# EAGLE board solenoid valve ver2  (EAGLE 9.2.2)
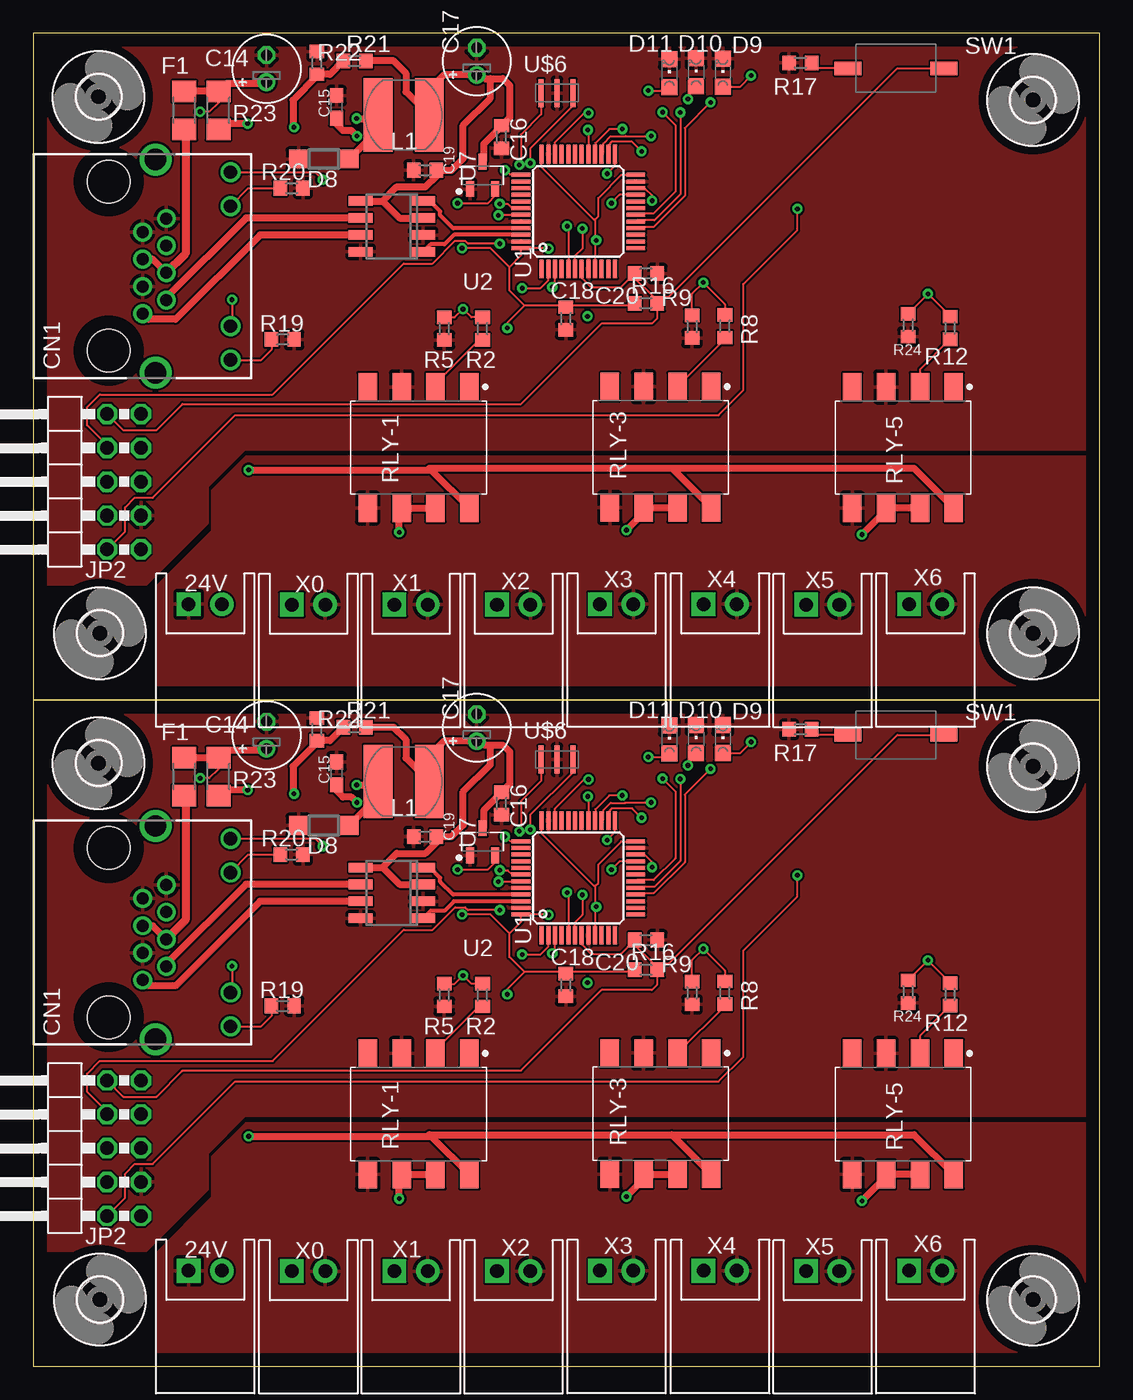
[diagram p0: board, top side]
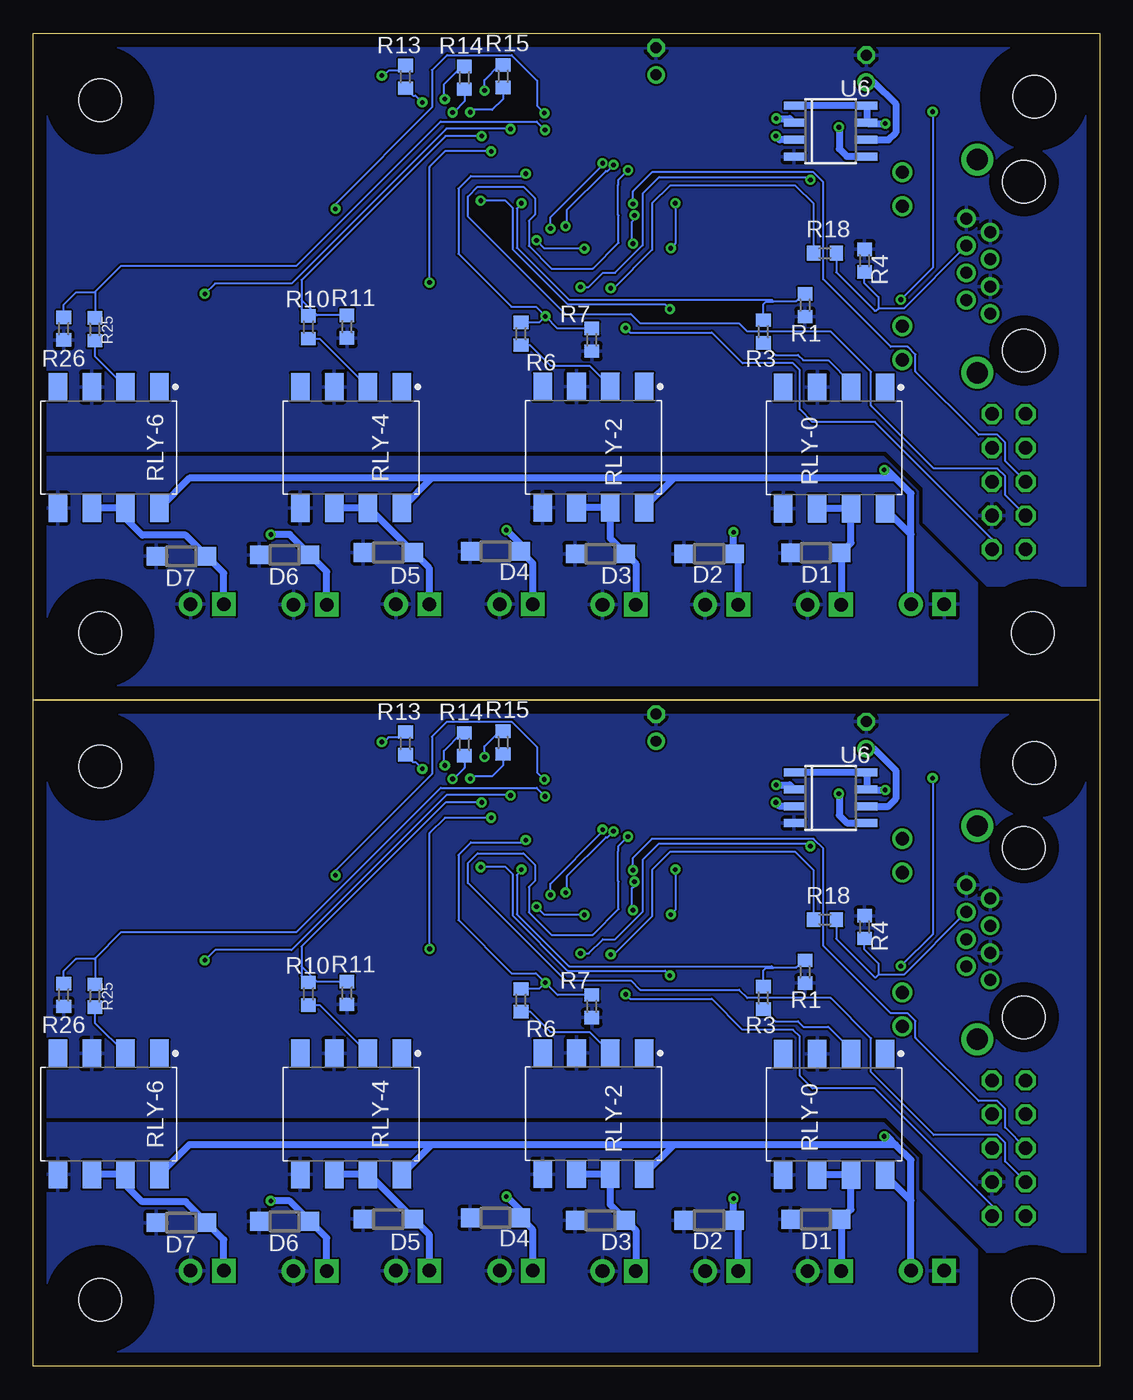
[diagram p1: board, bottom side, seen from below]

Size 80 x 100 mm. Coordinates in mm from the lower left corner, seen from the top.
Outline: 80,50 80,0 0,0 0,50
Outline: 80,50 0,50
Outline: 0,50 80,50
Outline: 80,50 80,100 0,100 0,50
Copper layers (1*16): Top 0.035mm / dielectric 1.5mm / Bottom 0.035mm
Design rules "default": minimum track width 6mil, minimum drill 0.35mm, track to track 6mil, track to pad 6mil, pad to pad 6mil, via to via 6mil, smd to smd 6mil, copper to edge 40mil, drill to drill 6mil, minimum pad ring 10mil, minimum via ring 8mil, stop-mask expansion 4mil, vias tented up to drill 0mil, thermal gap 10mil

## Footprints (pad centres in the part's own frame; a part is rotated, then mirrored left to right if it is on the bottom)
S2B-XH-A = drill 1.016 pad 1.778 square: 1 1.25,0 | drill 1.016 pad 1.778: 2 -1.25,0
E2-5 = drill 0.813 pad 1.27: + -1.016,0 | drill 0.813 pad 1.27 octagon: - 1.016,0
C0603 = smd 1.1 x 1: 1 -0.85,0; 2 0.85,0
C0603' = smd 1 x 1.1: 1 -0.85,0; 2 0.85,0
8P8C-LED = drill 0.9 pad 1.3: 1 3.57,-3.81; 2 2.55,-2.03; 3 1.53,-3.81; 4 0.51,-2.03; 5 -0.51,-3.81; 6 -1.53,-2.03; 7 -2.55,-3.81; 8 -3.57,-2.03 | drill 1 pad 1.422: GA 4.5,2.78; GC 7.04,2.78; YA -7.04,2.78; YC -4.5,2.78 | drill 1.6 pad 2.184: M1 -8,-2.85; M2 8,-2.85 | hole 3.2: 6.35,-6.35; -6.35,-6.35
SOD123 = smd 1.4 x 1.4: A 1.9,0; C -1.9,0
CHIPLED_0805 = smd 1.2 x 1.2: A 0,-1.05; C 0,1.05
R1206 = smd 1.6 x 1.803: 1 -1.422,0; 2 1.422,0
2X05/90 = drill 1.016 octagon: 1 -5.08,-6.35; 2 -5.08,-3.81; 3 -2.54,-6.35; 4 -2.54,-3.81; 5 0,-6.35; 6 0,-3.81; 7 2.54,-6.35; 8 2.54,-3.81; 9 5.08,-6.35; 10 5.08,-3.81
L5852 = smd 2.15 x 5.5: P$1 1.925,0; P$2 -1.925,0
R0603 = smd 1 x 1.1: 1 -0.85,0; 2 0.85,0
SOP254P1016X385-8 = smd 2.09 x 1.389: 1 -4.54,3.81; 2 -4.54,1.27; 3 -4.54,-1.27; 4 -4.54,-3.81; 5 4.54,-3.81; 6 4.54,-1.27; 7 4.54,1.27; 8 4.54,3.81
SWITCH_TACTILE_3X6 = smd 2 x 1: P$1 -3.6,0; P$2 3.6,0
LQFP48 = smd 1.4 x 0.3: 1 -4.3,2.75; 2 -4.3,2.25; 3 -4.3,1.75; 4 -4.3,1.25; 5 -4.3,0.75; 6 -4.3,0.25; 7 -4.3,-0.25; 8 -4.3,-0.75; 9 -4.3,-1.25; 10 -4.3,-1.75; 11 -4.3,-2.25; 12 -4.3,-2.75; 25 4.3,-2.75; 26 4.3,-2.25; 27 4.3,-1.75; 28 4.3,-1.25; 29 4.3,-0.75; 30 4.3,-0.25; 31 4.3,0.25; 32 4.3,0.75; 33 4.3,1.25; 34 4.3,1.75; 35 4.3,2.25; 36 4.3,2.75 | smd 0.3 x 1.4: 13 -2.75,-4.3; 14 -2.25,-4.3; 15 -1.75,-4.3; 16 -1.25,-4.3; 17 -0.75,-4.3; 18 -0.25,-4.3; 19 0.25,-4.3; 20 0.75,-4.3; 21 1.25,-4.3; 22 1.75,-4.3; 23 2.25,-4.3; 24 2.75,-4.3; 37 2.75,4.3; 38 2.25,4.3; 39 1.75,4.3; 40 1.25,4.3; 41 0.75,4.3; 42 0.25,4.3; 43 -0.25,4.3; 44 -0.75,4.3; 45 -1.25,4.3; 46 -1.75,4.3; 47 -2.25,4.3; 48 -2.75,4.3
SO08 = smd 0.72 x 1.78: 1 -1.905,-2.35; 2 -0.635,-2.35; 3 0.635,-2.35; 4 1.905,-2.35; 5 1.905,2.35; 6 0.635,2.35; 7 -0.635,2.35; 8 -1.905,2.35
SOIC8 = smd 0.6 x 1.5: 1 -1.905,-2.75; 2 -0.635,-2.75; 3 0.635,-2.75; 4 1.905,-2.75; 5 1.905,2.75; 6 0.635,2.75; 7 -0.635,2.75; 8 -1.905,2.75
SOT95P240X110-3 = smd 1.18 x 0.609: 1 -1.024,0.95; 2 -1.024,-0.95; 3 1.024,0
3,2 = hole 3.2: 0,0
CSTCE8M00G55 = smd 0.4 x 2.1: 1 -1.2,0; 2 0,0; 3 1.2,0

## Placement (x,y rotation side)
24V  [S2B-XH-A]  12.9,7.16 180 top
24V1  [S2B-XH-A]  12.9,57.16 180 top
C1  22u  [E2-5]  17.5,97.35 90 top
C2  [C0603]  22.76,94.48 90 top
C3  100n  [C0603']  35.13,92.21 270 top
C4  22u  [E2-5]  33.27,97.9 90 top
C5  100n  [C0603']  39.95,78.6 270 top
C6  100n  [C0603']  29.39,89.73 0 top
C7  100n  [C0603']  45.97,81.98 180 top
C14  22u  [E2-5]  17.5,47.35 90 top
C15  [C0603]  22.76,44.48 90 top
C16  100n  [C0603']  35.13,42.21 270 top
C17  22u  [E2-5]  33.27,47.9 90 top
C18  100n  [C0603']  39.95,28.6 270 top
C19  100n  [C0603']  29.39,39.73 0 top
C20  100n  [C0603']  45.97,31.98 180 top
CN1  8P8C-LED  [8P8C-LED]  12.01,32.54 270 top
CN2  8P8C-LED  [8P8C-LED]  12.01,82.54 270 top
D1  [SOD123]  21.29,11.02 180 bottom
D2  [SOD123]  29.29,10.95 180 bottom
D3  [SOD123]  37.44,10.95 180 bottom
D4  [SOD123]  45.31,11.13 180 bottom
D5  [SOD123]  53.37,11.05 180 bottom
D6  [SOD123]  61.14,10.87 180 bottom
D7  [SOD123]  68.88,10.77 180 bottom
D8  [SOD123]  21.79,40.56 180 top
D9  [CHIPLED_0805]  51.74,47.04 0 top
D10  [CHIPLED_0805]  49.73,47.07 0 top
D11  [CHIPLED_0805]  47.73,47.02 0 top
D12  [SOD123]  21.29,61.02 180 bottom
D13  [CHIPLED_0805]  49.73,97.07 0 top
D14  [CHIPLED_0805]  47.73,97.02 0 top
D15  [SOD123]  29.29,60.95 180 bottom
D16  [SOD123]  37.44,60.95 180 bottom
D17  [SOD123]  45.31,61.13 180 bottom
D18  [SOD123]  53.37,61.05 180 bottom
D19  [SOD123]  61.14,60.87 180 bottom
D20  [SOD123]  68.88,60.77 180 bottom
D21  [SOD123]  21.79,90.56 180 top
D22  [CHIPLED_0805]  51.74,97.04 0 top
F1  [R1206]  11.33,44.22 270 top
F2  [R1206]  11.33,94.22 270 top
JP1  [2X05/90]  1.73,66.36 90 top
JP2  [2X05/90]  1.73,16.36 90 top
L1  L5852  [L5852]  27.79,43.87 180 top
L2  L5852  [L5852]  27.79,93.87 180 top
R1  10k  [R0603]  22.1,29.59 270 bottom
R2  100R  [R0603]  33.71,27.84 270 top
R3  100R  [R0603]  25.22,27.64 270 bottom
R4  100k  [R0603]  17.63,32.94 90 bottom
R5  10k  [R0603]  30.84,27.84 270 top
R6  100R  [R0603]  43.41,27.46 270 bottom
R7  10k  [R0603]  38.1,27 270 bottom
R8  100R  [R0603]  51.89,28.02 270 top
R9  10k  [R0603]  49.43,27.99 270 top
R10  100R  [R0603]  59.36,27.94 270 bottom
R11  10k  [R0603]  56.46,27.99 270 bottom
R12  100R  [R0603]  68.78,27.89 270 top
R13  1k  [R0603]  52.07,46.74 90 bottom
R14  1k  [R0603]  47.65,46.66 90 bottom
R15  1k  [R0603]  44.75,46.79 90 bottom
R16  10k  [R0603]  45.97,29.74 0 top
R17  100  [R0603]  57.56,47.78 180 top
R18  1k  [R0603]  20.6,33.5 0 bottom
R19  4k7  [R0603]  18.72,27.03 180 top
R20  1k  [R0603]  19.38,38.38 180 top
R21  [R0603]  24.1,47.93 0 top
R22  [R0603]  21.29,47.78 270 top
R23  [R1206]  13.89,44.22 270 top
R24  10k  [R0603]  65.63,28.09 270 top
R25  100R  [R0603]  75.39,27.79 270 bottom
R26  10k  [R0603]  77.72,27.84 270 bottom
R27  10k  [R0603]  22.1,79.59 270 bottom
R28  100R  [R0603]  59.36,77.94 270 bottom
R29  10k  [R0603]  56.46,77.99 270 bottom
R30  100R  [R0603]  68.78,77.89 270 top
R31  1k  [R0603]  52.07,96.74 90 bottom
R32  1k  [R0603]  47.65,96.66 90 bottom
R33  1k  [R0603]  44.75,96.79 90 bottom
R34  10k  [R0603]  45.97,79.74 0 top
R35  100  [R0603]  57.56,97.78 180 top
R36  1k  [R0603]  20.6,83.5 0 bottom
R37  4k7  [R0603]  18.72,77.03 180 top
R38  100R  [R0603]  33.71,77.84 270 top
R39  1k  [R0603]  19.38,88.38 180 top
R40  [R0603]  24.1,97.93 0 top
R41  [R0603]  21.29,97.78 270 top
R42  [R1206]  13.89,94.22 270 top
R43  10k  [R0603]  65.63,78.09 270 top
R44  100R  [R0603]  75.39,77.79 270 bottom
R45  10k  [R0603]  77.72,77.84 270 bottom
R46  100R  [R0603]  25.22,77.64 270 bottom
R47  100k  [R0603]  17.63,82.94 90 bottom
R48  10k  [R0603]  30.84,77.84 270 top
R49  100R  [R0603]  43.41,77.46 270 bottom
R50  10k  [R0603]  38.1,77 270 bottom
R51  100R  [R0603]  51.89,78.02 270 top
R52  10k  [R0603]  49.43,77.99 270 top
RLY-0  PHOTORELAY  [SOP254P1016X385-8]  19.91,18.9 270 bottom
RLY-1  PHOTORELAY  [SOP254P1016X385-8]  28.91,18.92 270 top
RLY-2  PHOTORELAY  [SOP254P1016X385-8]  37.97,18.95 270 bottom
RLY-3  PHOTORELAY  [SOP254P1016X385-8]  47.07,18.95 270 top
RLY-4  PHOTORELAY  [SOP254P1016X385-8]  56.16,18.92 270 bottom
RLY-5  PHOTORELAY  [SOP254P1016X385-8]  65.25,18.92 270 top
RLY-6  PHOTORELAY  [SOP254P1016X385-8]  74.35,18.92 270 bottom
RLY-7  PHOTORELAY  [SOP254P1016X385-8]  19.91,68.9 270 bottom
RLY-8  PHOTORELAY  [SOP254P1016X385-8]  28.91,68.92 270 top
RLY-9  PHOTORELAY  [SOP254P1016X385-8]  37.97,68.95 270 bottom
RLY-10  PHOTORELAY  [SOP254P1016X385-8]  47.07,68.95 270 top
RLY-11  PHOTORELAY  [SOP254P1016X385-8]  56.16,68.92 270 bottom
RLY-12  PHOTORELAY  [SOP254P1016X385-8]  65.25,68.92 270 top
RLY-13  PHOTORELAY  [SOP254P1016X385-8]  74.35,68.92 270 bottom
SW1  SWITCH_TACTILETOP  [SWITCH_TACTILE_3X6]  64.72,47.37 0 top
SW2  SWITCH_TACTILETOP  [SWITCH_TACTILE_3X6]  64.72,97.37 0 top
U1  STM32F103C8  [LQFP48]  40.89,36.63 90 top
U2  NCV7351D1E  [SO08]  26.9,35.51 90 top
U3  STM32F103C8  [LQFP48]  40.89,86.63 90 top
U4  NCV7351D1E  [SO08]  26.9,85.51 90 top
U5  MC34063AD  [SOIC8]  20.17,92.65 270 bottom
U6  MC34063AD  [SOIC8]  20.17,42.65 270 bottom
U7  XC6206  [SOT95P240X110-3]  33.71,39.34 90 top
U8  XC6206  [SOT95P240X110-3]  33.71,89.34 90 top
U$1  [3,2]  5,5 0 top
U$2  [3,2]  4.9,45.24 0 top
U$3  [3,2]  75,45 0 top
U$4  [3,2]  75,5 0 top
U$5  [3,2]  5,55 0 top
U$6  CSTCE8M00G55  [CSTCE8M00G55]  39.29,45.52 0 top
U$7  [3,2]  4.9,95.24 0 top
U$8  [3,2]  75,95 0 top
U$9  [3,2]  75,55 0 top
U$10  CSTCE8M00G55  [CSTCE8M00G55]  39.29,95.52 0 top
X0  [S2B-XH-A]  20.65,7.14 180 top
X1  [S2B-XH-A]  28.35,7.14 180 top
X2  [S2B-XH-A]  36.04,7.14 180 top
X3  [S2B-XH-A]  43.76,7.16 180 top
X4  [S2B-XH-A]  51.54,7.16 180 top
X5  [S2B-XH-A]  59.23,7.14 180 top
X6  [S2B-XH-A]  66.95,7.16 180 top
X7  [S2B-XH-A]  20.65,57.14 180 top
X8  [S2B-XH-A]  28.35,57.14 180 top
X9  [S2B-XH-A]  43.76,57.16 180 top
X10  [S2B-XH-A]  36.04,57.14 180 top
X11  [S2B-XH-A]  51.54,57.16 180 top
X12  [S2B-XH-A]  59.23,57.14 180 top
X13  [S2B-XH-A]  66.95,57.16 180 top

## Library data of the parts
24V 24V1 X0 X1-X13 = jst-xh
C1 C3-C7 C14 C16-C20 R13-R17 R31-R35 = rcl
C2 C15 = rcl; SPICEPREFIX: C
CN1 CN2 = con-rj45; OC_FARNELL: unknown; OC_NEWARK: unknown
D1-D8 D12 D15-D21 = diode
D9-D11 D13 D14 D22 = led
F1 F2 R1-R12 R18-R30 R36-R52 = rcl; SPICEPREFIX: R
JP1 JP2 = pinhead
L1 L2 = l_ysk
RLY-0 RLY-1-RLY-13 = opto-coupler
SW1 SW2 = switch-tactile
U1 U3 = stm32_mcu
U2 U4 = on-semi
U5 U6 = mc34063
U7 U8 = torex
U$1-U$5 U$7-U$9 = holes
U$6 U$10 = resonator

## Nets
!EMS: R18.1 U1.2
!EMS1: R36.1 U3.2
!RESET: C20.2 JP2.10 R16.2 SW1.P$2 U1.7
!RESET1: C7.2 JP1.10 R34.2 SW2.P$2 U3.7
+3V1: C5.1 JP1.1 R34.1 U3.9 U3.24 U3.36 U3.48 U8.2
+3V3: C18.1 JP2.1 R16.1 U1.9 U1.24 U1.36 U1.48 U7.2
+5V: C16.1 C17.+ C19.2 L1.P$2 R21.2 U2.3 U2.5 U7.3
+5V1: C3.1 C4.+ C6.2 L2.P$2 R40.2 U4.3 U4.5 U8.3
+24V: C14.+ CN1.GA F1.1 R23.1 U6.6
+24V1: C1.+ CN2.GA F2.1 R42.1 U5.6
CANH: CN1.1 U2.7
CANH1: CN2.1 U4.7
CANL: CN1.2 U2.6
CANL1: CN2.2 U4.6
CANRX: U1.45 U2.4
CANRX1: U3.45 U4.4
CANTX: U1.46 U2.1
CANTX1: U3.46 U4.1
GND: 24V.1 D1.A D2.A D3.A D4.A D5.A D6.A D7.A RLY-0.5 RLY-1.5 RLY-2.5 RLY-3.5 RLY-4.5 RLY-5.5 RLY-6.5 X0.2 X1.2 X2.2 X3.2 X4.2 X5.2 X6.2
GND1: 24V1.1 D12.A D15.A D16.A D17.A D18.A D19.A D20.A RLY-7.5 RLY-8.5 RLY-9.5 RLY-10.5 RLY-11.5 RLY-12.5 RLY-13.5 X7.2 X8.2 X9.2 X10.2 X11.2 X12.2 X13.2
GNDIO: C14.- C15.2 C16.2 C17.- C18.2 C19.1 C20.1 CN1.3 CN1.7 CN1.8 D8.A D9.C D10.C D11.C JP2.3 R1.2 R4.2 R5.2 R7.2 R9.2 R11.2 R17.2 R19.1 R20.1 R22.1 R24.2 R26.2 RLY-0.3 RLY-1.3 RLY-2.3 RLY-3.3 RLY-4.3 RLY-5.3 RLY-6.3 U1.8 U1.23 U1.35 U1.44 U1.47 U2.2 U2.8 U6.4 U7.1 U$6.2
GNDIO1: C1.- C2.2 C3.2 C4.- C5.2 C6.1 C7.1 CN2.3 CN2.7 CN2.8 D13.C D14.C D21.A D22.C JP1.3 R27.2 R29.2 R35.2 R37.1 R39.1 R41.1 R43.2 R45.2 R47.2 R48.2 R50.2 R52.2 RLY-7.3 RLY-8.3 RLY-9.3 RLY-10.3 RLY-11.3 RLY-12.3 RLY-13.3 U3.8 U3.23 U3.35 U3.44 U3.47 U4.2 U4.8 U5.4 U8.1 U$10.2
LED0: R13.1 U1.16
LED1: R14.1 U1.17
LED2: R15.1 U1.18
LED3: R33.1 U3.18
LED4: R31.1 U3.16
LED5: R32.1 U3.17
LED_CAN: CN1.YA U1.3
LED_CAN1: CN2.YA U3.3
N$1: D2.C RLY-1.6 RLY-1.7 X1.1
N$2: R2.2 RLY-1.2
N$3: D1.C RLY-0.6 RLY-0.7 X0.1
N$4: D12.C RLY-7.6 RLY-7.7 X7.1
N$5: D3.C RLY-2.6 RLY-2.7 X2.1
N$6: R3.2 RLY-0.2
N$7: R46.2 RLY-7.2
N$8: R6.2 RLY-2.2
N$9: D10.A R14.2
N$10: D9.A R13.2
N$11: U1.6 U$6.3
N$12: CN1.4 CN1.5 F1.2
N$13: R23.2 U6.1 U6.7 U6.8
N$14: D8.C L1.P$1 U6.2
N$15: C15.1 U6.3
N$16: R17.1 SW1.P$1
N$17: R21.1 R22.2 U6.5
N$18: CN1.YC R20.2
N$19: U1.5 U$6.1
N$20: D15.C RLY-8.6 RLY-8.7 X8.1
N$21: D11.A R15.2
N$22: CN1.GC R19.2
N$23: D4.C RLY-3.6 RLY-3.7 X3.1
N$24: R8.2 RLY-3.2
N$25: R38.2 RLY-8.2
N$26: D5.C RLY-4.6 RLY-4.7 X4.1
N$27: R10.2 RLY-4.2
N$28: D16.C RLY-9.6 RLY-9.7 X10.1
N$29: D6.C RLY-5.6 RLY-5.7 X5.1
N$30: R12.2 RLY-5.2
N$31: R49.2 RLY-9.2
N$32: D7.C RLY-6.6 RLY-6.7 X6.1
N$33: R25.2 RLY-6.2
N$34: D17.C RLY-10.6 RLY-10.7 X9.1
N$35: R51.2 RLY-10.2
N$36: D18.C RLY-11.6 RLY-11.7 X11.1
N$37: R28.2 RLY-11.2
N$38: CN1.6 R4.1 R18.2
N$39: D19.C RLY-12.6 RLY-12.7 X12.1
N$40: R30.2 RLY-12.2
N$41: D20.C RLY-13.6 RLY-13.7 X13.1
N$42: R44.2 RLY-13.2
N$43: D13.A R32.2
N$44: D22.A R31.2
N$45: U3.5 U$10.1
N$46: R35.1 SW2.P$1
N$47: D14.A R33.2
N$48: CN2.4 CN2.5 F2.2
N$49: R42.2 U5.1 U5.7 U5.8
N$50: D21.C L2.P$1 U5.2
N$51: C2.1 U5.3
N$52: R40.1 R41.2 U5.5
N$53: CN2.6 R36.2 R47.1
N$54: U3.6 U$10.3
N$55: CN2.GC R37.2
N$56: CN2.YC R39.2
SOLV0: R1.1 R3.1 U1.21
SOLV1: R2.1 R5.1 U1.22
SOLV2: R6.1 R7.1 U1.25
SOLV3: R8.1 R9.1 U1.26
SOLV4: R10.1 R11.1 U1.27
SOLV5: R12.1 R24.1 U1.28
SOLV6: R25.1 R26.1 U1.29
SOLV7: U1.30
SOLV8: U1.41
SOLV9: R49.1 R50.1 U3.25
SOLV10: R38.1 R48.1 U3.22
SOLV11: R51.1 R52.1 U3.26
SOLV12: R30.1 R43.1 U3.28
SOLV13: R44.1 R45.1 U3.29
SOLV14: U3.30
SOLV15: U3.41
SOLV16: R27.1 R46.1 U3.21
SOLV17: R28.1 R29.1 U3.27
SWCLK: JP2.4 U1.37
SWCLK1: JP1.4 U3.37
SWDIO: JP2.2 U1.34
SWDIO1: JP1.2 U3.34
UART_RX: JP2.8 U1.43
UART_RX1: JP1.8 U3.43
UART_TX: JP2.6 U1.42
UART_TX1: JP1.6 U3.42
VCC: 24V.2 RLY-0.8 RLY-1.8 RLY-2.8 RLY-3.8 RLY-4.8 RLY-5.8 RLY-6.8
VCC1: 24V1.2 RLY-7.8 RLY-8.8 RLY-9.8 RLY-10.8 RLY-11.8 RLY-12.8 RLY-13.8

## Tracks (layer width: path | path; a pad name or v marks a point on that pad's centre or on a via)
!EMS  (via drill 0.35)
  Top 0.152: v36.68,30.89 38.05,30.89 38.64,31.48 U1.2
  Bottom 0.152: v36.68,30.89 36.45,30.89 33.58,33.76 33.58,37.24 32.25,38.57 22.81,38.57 21.45,37.21 R18.1
!EMS1  (via drill 0.35)
  Top 0.152: v36.68,80.89 38.05,80.89 38.64,81.48 U3.2
  Bottom 0.152: v36.68,80.89 36.45,80.89 33.58,83.76 33.58,87.24 32.25,88.57 22.81,88.57 21.45,87.21 R36.1
!RESET
  Top 0.152: U1.7 41.14,31.64 41.16,31.64 41.86,30.94 44.08,30.94 C20.2 45.12,31.62 46.52,30.23 | 46.52,30.23 46.82,29.92 R16.2 46.82,28.63 46.42,28.22 42.63,28.22 36.6,22.19 11.18,22.19 11.18,22.15 9.25,20.22 6.76,20.22 JP2.10 | 46.52,30.23 47.69,30.23 64.83,47.37 SW1.P$2
!RESET1
  Top 0.152: U3.7 41.14,81.64 41.16,81.64 41.86,80.94 44.08,80.94 C7.2 45.12,81.62 46.52,80.23 | 46.52,80.23 46.82,79.92 R34.2 46.82,78.63 46.42,78.22 42.63,78.22 36.6,72.19 11.18,72.19 11.18,72.15 9.25,70.22 6.76,70.22 JP1.10 | 46.52,80.23 47.69,80.23 64.83,97.37 SW2.P$2
+3V1  (via drill 0.35)
  Top 0.152: U3.36 38.14,89.95 42.08,86.02 42.14,86.02 | v38.66,83.86 38.64,83.88 U3.48 36.59,83.34 35.73,82.47 | v31.83,87.26 34.11,87.26 34.66,87.81 U8.2 | R34.1 44.97,79.59 40.09,79.59 C5.1 39.84,79.57 36.85,79.57 | v32.17,83.88 34.32,83.88 35.73,82.47 | 42.14,86.02 42.14,84.57 v42.24,84.47 42.14,84.37 U3.9 | 42.14,86.02 42.39,86.27 42.39,87.64 44.13,89.38 U3.24 | 36.85,79.57 35.73,80.7 35.73,82.47 | v35.56,77.89 35.56,78.27 36.85,79.57
  Bottom 0.152: v38.66,83.86 41.63,83.86 v42.24,84.47 | v31.83,87.26 31.83,84.22 v32.17,83.88 | JP1.1 8.08,62.06 16.86,70.84 21.54,70.84 22.49,71.79 22.49,74.74 22.99,75.24 26.78,75.24 29.1,77.56 35.23,77.56 v35.56,77.89
+3V3  (via drill 0.35)
  Top 0.152: U1.36 38.14,39.95 42.08,36.02 42.14,36.02 | v38.66,33.86 38.64,33.88 U1.48 36.59,33.34 35.73,32.47 | v31.83,37.26 34.11,37.26 34.66,37.8 U7.2 | R16.1 44.97,29.59 40.09,29.59 C18.1 39.84,29.57 36.85,29.57 | v32.17,33.88 34.32,33.88 35.73,32.47 | 42.14,36.02 42.14,34.57 v42.24,34.47 42.14,34.37 U1.9 | 42.14,36.02 42.39,36.27 42.39,37.64 44.13,39.38 U1.24 | 36.85,29.57 35.73,30.7 35.73,32.47 | v35.56,27.89 35.56,28.27 36.85,29.57
  Bottom 0.152: v38.66,33.86 41.63,33.86 v42.24,34.47 | v31.83,37.26 31.83,34.22 v32.17,33.88 | JP2.1 8.08,12.06 16.86,20.84 21.54,20.84 22.49,21.79 22.49,24.74 22.99,25.24 26.78,25.24 29.1,27.56 35.23,27.56 v35.56,27.89
+5V
  Top 0.508: R21.2 27.04,47.93 27.96,47 27.96,45.61 L1.P$2 29.71,45.79 30.81,46.89 C17.+ 33.58,46.89 33.87,46.6 34.29,46.6 | U7.3 33.78,40.45 33.78,41.69 35.13,43.04 C16.1 35.74,43.67 35.74,46.1 35.24,46.6 34.29,46.6 | 26.2,37.41 27.47,36.14 U2.3 | 34.29,46.6 34.29,45.14 32.26,43.1 32.26,40.6 31.38,39.73 C19.2 30.24,39.29 29.43,38.48 27.27,38.48 26.2,37.41 | U2.5 26.2,37.41
+5V1
  Top 0.508: R40.2 27.04,97.93 27.96,97 27.96,95.61 L2.P$2 29.71,95.79 30.81,96.89 C4.+ 33.58,96.89 33.87,96.6 34.29,96.6 | U8.3 33.78,90.44 33.78,91.69 35.13,93.04 C3.1 35.74,93.67 35.74,96.1 35.24,96.6 34.29,96.6 | 26.2,87.41 27.47,86.14 U4.3 | 34.29,96.6 34.29,95.14 32.26,93.1 32.26,90.6 31.38,89.73 C6.2 30.24,89.29 29.43,88.48 27.27,88.48 26.2,87.41 | U4.5 26.2,87.41
+24V  (via drill 0.35)
  Top 0.152: R23.1 13.89,44.81 13.21,44.12 v12.52,44.12 | v14.91,30.02 14.91,28.15 CN1.GA
  Top 0.508: F1.1 R23.1 14.45,46.2 17.37,46.2 C14.+
  Bottom 0.152: v12.52,44.12 12.52,32.41 v14.91,30.02
  Bottom 0.508: U6.6 15.84,42.01 15.3,42.56 15.3,44.71 16.92,46.33 C14.+
+24V1  (via drill 0.35)
  Top 0.152: R42.1 13.89,94.81 13.21,94.12 v12.52,94.12 | v14.91,80.02 14.91,78.15 CN2.GA
  Top 0.508: F2.1 R42.1 14.45,96.2 17.37,96.2 C1.+
  Bottom 0.152: v12.52,94.12 12.52,82.41 v14.91,80.02
  Bottom 0.508: U5.6 15.84,92.01 15.3,92.56 15.3,94.71 16.92,96.33 C1.+
CANH
  Top 0.508: U2.7 17,34.87 10.67,28.55 8.62,28.55 CN1.1
CANH1
  Top 0.508: U4.7 17,84.87 10.67,78.55 8.62,78.55 CN2.1
CANL
  Top 0.508: CN1.2 9.98,30.17 15.96,36.14 U2.6
CANL1
  Top 0.508: CN2.2 9.98,80.17 15.96,86.14 U4.6
CANRX
  Top 0.305: U1.45 31.5,35.38 30.53,36.35 30.53,36.65 29.76,37.41 U2.4
CANRX1
  Top 0.305: U3.45 31.5,85.38 30.53,86.35 30.53,86.64 29.76,87.41 U4.4
CANTX
  Top 0.305: U1.46 31.56,34.88 30.85,34.16 29.81,34.16 U2.1
CANTX1
  Top 0.305: U3.46 31.56,84.88 30.85,84.16 29.81,84.16 U4.1
GND
  pour Top: 9.22,-1.47 9.22,8.48 13.44,12.7 13.44,15.75 15.95,18.26 80.16,18.26 80.16,-0.1 10.59,-0.1
  pour Bottom: 9.17,-0.2 9.17,8.74 13.59,13.16 13.59,15.61 16.2,18.21 80.06,18.21 80.06,-0.33 79.91,-0.48 9.45,-0.48
GND1
  pour Top: 9.22,48.53 9.22,58.48 13.44,62.7 13.44,65.75 15.95,68.26 80.16,68.26 80.16,49.9 10.59,49.9
  pour Bottom: 9.17,49.8 9.17,58.74 13.59,63.16 13.59,65.61 16.2,68.21 80.06,68.21 80.06,49.67 79.91,49.52 9.45,49.52
GNDIO
  pour Top: 0,50.04 0,8.71 0.05,8.66 8.51,8.66 10.26,10.41 13.11,13.26 13.11,15.98 15.9,18.77 80.06,18.77 80.06,49.91 79.88,50.09 0.05,50.09
  pour Bottom: 0,49.89 0,8.61 0.03,8.59 0.08,8.53 8.43,8.53 13.18,13.28 13.18,15.88 15.98,18.67 79.81,18.67 80.01,18.87 80.01,50.04 0.15,50.04
GNDIO1
  pour Top: 0,100.04 0,58.71 0.05,58.66 8.51,58.66 10.26,60.41 13.11,63.26 13.11,65.98 15.9,68.77 80.06,68.77 80.06,99.91 79.88,100.09 0.05,100.09
  pour Bottom: 0,99.89 0,58.61 0.03,58.59 0.08,58.53 8.43,58.53 13.18,63.28 13.18,65.88 15.98,68.67 79.81,68.67 80.01,68.87 80.01,100.04 0.15,100.04
LED0  (via drill 0.35)
  Top 0.152: v50.81,44.82 48.88,42.89 48.88,37.81 46.55,35.47 45.29,35.47 U1.16
  Bottom 0.152: R13.1 51.51,45.33 51.32,45.33 v50.81,44.82
LED1  (via drill 0.35)
  Top 0.152: U1.17 45.29,35.97 46.6,35.97 48.54,37.92 v48.54,44.06
  Bottom 0.152: R14.1 47.65,44.9 48.41,44.14 48.47,44.14 v48.54,44.06
LED2  (via drill 0.35)
  Top 0.152: U1.18 45.29,36.47 46.55,36.47 48.18,38.1 48.18,43.12 v47.22,44.08
  Bottom 0.152: R15.1 44.76,45.07 45.57,44.26 47.04,44.26 v47.22,44.08
LED3  (via drill 0.35)
  Top 0.152: U3.18 45.29,86.47 46.55,86.47 48.18,88.11 48.18,93.12 v47.22,94.08
  Bottom 0.152: R33.1 44.76,95.07 45.57,94.26 47.04,94.26 v47.22,94.08
LED4  (via drill 0.35)
  Top 0.152: v50.81,94.82 48.88,92.89 48.88,87.81 46.55,85.47 45.29,85.47 U3.16
  Bottom 0.152: R31.1 51.51,95.33 51.32,95.33 v50.81,94.82
LED5  (via drill 0.35)
  Top 0.152: U3.17 45.29,85.97 46.6,85.97 48.54,87.92 v48.54,94.06
  Bottom 0.152: R32.1 47.65,94.89 48.41,94.14 48.47,94.14 v48.54,94.06
LED_CAN  (via drill 0.35)
  Top 0.152: CN1.YA 21.13,39.58 v21.69,39.01 | v38.94,30.96 39.12,31.14 39.12,32.3 U1.3
  Bottom 0.152: v38.94,30.96 38.33,30.96 37.26,32.03 36.35,32.03 34.29,34.09 34.29,37.98 33.05,39.22 21.89,39.22 v21.69,39.01
LED_CAN1  (via drill 0.35)
  Top 0.152: CN2.YA 21.13,89.58 v21.69,89.01 | v38.94,80.96 39.12,81.14 39.12,82.3 U3.3
  Bottom 0.152: v38.94,80.96 38.33,80.96 37.26,82.03 36.35,82.03 34.29,84.09 34.29,87.97 33.05,89.22 21.89,89.22 v21.69,89.01
N$1  (via drill 0.35)
  Top 0.508: v27.46,12.57 27.46,14.21 RLY-1.6 RLY-1.7
  Bottom 0.508: X1.1 27.1,10.66 D2.C 27.46,11.02 v27.46,12.57
N$2
  Top 0.152: R2.2 33.43,26.99 30.18,23.74 RLY-1.2
N$3
  Bottom 0.508: X0.1 19.39,7.15 D1.C 18.64,11.77 RLY-0.7 RLY-0.6
N$4
  Bottom 0.508: X7.1 19.39,57.15 D12.C 18.64,61.77 RLY-7.7 RLY-7.6
N$5
  Bottom 0.508: X2.1 34.79,10.2 D3.C 36.7,12.11 RLY-2.7 RLY-2.6
N$6
  Bottom 0.152: R3.2 24.31,25.87 22.63,25.87 22.23,25.47 20.34,25.47 18.64,23.77 RLY-0.2
N$7
  Bottom 0.152: R46.2 24.31,75.87 22.63,75.87 22.23,75.47 20.34,75.47 18.64,73.77 RLY-7.2
N$8
  Bottom 0.152: R6.2 42.75,26.61 41.2,25.06 38.28,25.06 RLY-2.2
N$9  (via drill 0.35)
  Top 0.152: D10.A 49.12,45.41 v49.12,45.07
  Bottom 0.152: R14.2 47.85,47.51 49.2,46.16 49.2,45.15 v49.12,45.07
N$10  (via drill 0.35)
  Top 0.152: D9.A 53.04,45.99 53.85,46.8 v53.85,46.83
  Bottom 0.152: R13.2 52.07,47.19 53.34,47.19 53.7,46.83 v53.85,46.83
N$11  (via drill 0.35)
  Top 0.152: U$6.3 40.49,44.56 37.29,41.35 v37.29,40.26 | v41.2,35.36 41.2,33.86 40.64,33.3 U1.6
  Bottom 0.152: v41.2,35.36 41.2,36.2 37.39,40.01 37.39,40.16 v37.29,40.26
N$12
  Top 0.508: CN1.4 8.96,33.05 CN1.5
  Top 0.61: F1.2 11.43,42.7 11.43,33.47 CN1.4
N$13  (via drill 0.35)
  Top 0.508: R23.2 14.32,43.23 v16.08,43.23
  Bottom 0.508: v16.08,43.23 17.37,43.23 U6.7 U6.8 U6.1
N$14  (via drill 0.35)
  Top 0.508: v24.26,43.61 25.61,43.61 L1.P$1 25.86,42.73 D8.C
  Bottom 0.508: v24.26,43.61 23.25,43.61 U6.2
N$15  (via drill 0.35)
  Top 0.508: v24.28,42.29 23.88,42.7 23.24,42.7 22.76,43.18 C15.1
  Bottom 0.508: U6.3 24,42.01 v24.28,42.29
N$16
  Top 0.152: SW1.P$1 58.81,47.37 R17.1
N$17  (via drill 0.35)
  Top 0.508: R21.1 22.25,46.93 R22.2 21.29,46.8 19.48,45 19.48,43.03 v19.56,42.95
  Bottom 0.508: U6.5 17.44,40.77 18.97,40.77 19.53,41.33 19.53,42.93 v19.56,42.95
N$18
  Top 0.152: CN1.YC 16.14,38.38 R20.2
N$19  (via drill 0.35)
  Top 0.152: U$6.1 38.09,43.92 36.58,42.4 36.58,40.23 v36.47,40.13 | v40.06,35.53 40.15,35.45 U1.5
  Bottom 0.152: v36.47,40.13 36.93,39.67 37.03,39.67 39.98,36.73 39.98,35.61 v40.06,35.53
N$20  (via drill 0.35)
  Top 0.508: v27.46,62.57 27.46,64.2 RLY-8.6 RLY-8.7
  Bottom 0.508: X8.1 27.1,60.66 D15.C 27.46,61.02 v27.46,62.57
N$21  (via drill 0.35)
  Top 0.152: v46.15,45.71 47.47,45.71 D11.A
  Bottom 0.152: R15.2 45.01,47.64 46.15,46.5 v46.15,45.71
N$22
  Top 0.152: R19.2 17.87,26.26 17.1,25.5 CN1.GC
N$23  (via drill 0.35)
  Top 0.152: 45.95,14.41 RLY-3.6
  Top 0.508: v44.5,12.72 45.95,14.17 45.95,14.41 | RLY-3.6 RLY-3.7
  Bottom 0.508: X3.1 42.51,10.23 D4.C 43.41,11.64 v44.5,12.72
N$24
  Top 0.152: R8.2 51.89,27.04 RLY-3.2
N$25
  Top 0.152: R38.2 33.43,76.99 30.18,73.74 RLY-8.2
N$26
  Bottom 0.508: RLY-4.6 RLY-4.7 54.8,14.38 D5.C 50.32,9.91 50.32,7.2 X4.1
N$27
  Bottom 0.152: R10.2 58.52,27.09 RLY-4.2
N$28
  Bottom 0.508: X10.1 34.79,60.2 D16.C 36.7,62.11 RLY-9.7 RLY-9.6
N$29  (via drill 0.35)
  Top 0.508: v62.18,12.39 63.98,14.2 RLY-5.6 RLY-5.7
  Bottom 0.508: X5.1 57.98,9.62 D6.C 60.76,12.39 v62.18,12.39
N$30
  Top 0.152: R12.2 66.52,24.78 RLY-5.2
N$31
  Bottom 0.152: R49.2 42.75,76.61 41.2,75.06 38.28,75.06 RLY-9.2
N$32
  Bottom 0.152: 73.1,14.38 RLY-6.7
  Bottom 0.508: X6.1 65.7,9.49 D7.C 68.56,12.35 71.83,12.35 73.1,13.62 73.1,14.38 | RLY-6.7 RLY-6.6
N$33
  Bottom 0.152: R25.2 75.39,25.77 RLY-6.2
N$34  (via drill 0.35)
  Top 0.152: 45.95,64.41 RLY-10.6
  Top 0.508: v44.5,62.73 45.95,64.17 45.95,64.41 | RLY-10.6 RLY-10.7
  Bottom 0.508: X9.1 42.51,60.23 D17.C 43.41,61.64 v44.5,62.73
N$35
  Top 0.152: R51.2 51.89,77.04 RLY-10.2
N$36
  Bottom 0.508: RLY-11.6 RLY-11.7 54.8,64.38 D18.C 50.32,59.91 50.32,57.2 X11.1
N$37
  Bottom 0.152: R28.2 58.52,77.09 RLY-11.2
N$38
  Bottom 0.152: CN1.6 14.7,29.36 16.59,29.36 | R4.1 17.63,31.26 16.59,30.21 16.59,29.36 | R18.2 19.75,32.07 16.86,29.18 16.76,29.18 16.59,29.36
N$39  (via drill 0.35)
  Top 0.508: v62.18,62.4 63.98,64.2 RLY-12.6 RLY-12.7
  Bottom 0.508: X12.1 57.98,59.62 D19.C 60.76,62.4 v62.18,62.4
N$40
  Top 0.152: R30.2 66.52,74.78 RLY-12.2
N$41
  Bottom 0.152: 73.1,64.38 RLY-13.7
  Bottom 0.508: X13.1 65.7,59.49 D20.C 68.56,62.35 71.83,62.35 73.1,63.62 73.1,64.38 | RLY-13.7 RLY-13.6
N$42
  Bottom 0.152: R44.2 75.39,75.77 RLY-13.2
N$43  (via drill 0.35)
  Top 0.152: D13.A 49.12,95.41 v49.12,95.07
  Bottom 0.152: R32.2 47.85,97.51 49.2,96.16 49.2,95.15 v49.12,95.07
N$44  (via drill 0.35)
  Top 0.152: D22.A 53.04,95.99 53.85,96.8 v53.85,96.83
  Bottom 0.152: R31.2 52.07,97.19 53.34,97.19 53.7,96.83 v53.85,96.83
N$45  (via drill 0.35)
  Top 0.152: U$10.1 38.09,93.92 36.58,92.4 36.58,90.23 v36.47,90.13 | v40.06,85.53 40.15,85.45 U3.5
  Bottom 0.152: v36.47,90.13 36.93,89.67 37.03,89.67 39.98,86.73 39.98,85.61 v40.06,85.53
N$46
  Top 0.152: SW2.P$1 58.81,97.37 R35.1
N$47  (via drill 0.35)
  Top 0.152: v46.15,95.71 47.47,95.71 D14.A
  Bottom 0.152: R33.2 45.01,97.64 46.15,96.5 v46.15,95.71
N$48
  Top 0.508: CN2.4 8.96,83.05 CN2.5
  Top 0.61: F2.2 11.43,92.7 11.43,83.47 CN2.4
N$49  (via drill 0.35)
  Top 0.508: R42.2 14.32,93.23 v16.08,93.23
  Bottom 0.508: v16.08,93.23 17.37,93.23 U5.7 U5.8 U5.1
N$50  (via drill 0.35)
  Top 0.508: v24.26,93.61 25.61,93.61 L2.P$1 25.86,92.73 D21.C
  Bottom 0.508: v24.26,93.61 23.25,93.61 U5.2
N$51  (via drill 0.35)
  Top 0.508: v24.28,92.29 23.88,92.7 23.24,92.7 22.76,93.18 C2.1
  Bottom 0.508: U5.3 24,92.01 v24.28,92.29
N$52  (via drill 0.35)
  Top 0.508: R40.1 22.25,96.93 R41.2 21.29,96.8 19.48,95 19.48,93.03 v19.56,92.95
  Bottom 0.508: U5.5 17.44,90.77 18.97,90.77 19.53,91.33 19.53,92.93 v19.56,92.95
N$53
  Bottom 0.152: CN2.6 14.7,79.36 16.59,79.36 | R47.1 17.63,81.26 16.59,80.21 16.59,79.36 | R36.2 19.75,82.07 16.86,79.18 16.76,79.18 16.59,79.36
N$54  (via drill 0.35)
  Top 0.152: U$10.3 40.49,94.56 37.29,91.35 v37.29,90.26 | v41.2,85.36 41.2,83.86 40.64,83.3 U3.6
  Bottom 0.152: v41.2,85.36 41.2,86.19 37.39,90 37.39,90.16 v37.29,90.26
N$55
  Top 0.152: R37.2 17.87,76.26 17.1,75.5 CN2.GC
N$56
  Top 0.152: CN2.YC 16.14,88.38 R39.2
SOLV0  (via drill 0.35)
  Top 0.152: U1.21 44,37.88 v43.38,37.26
  Bottom 0.152: 24.53,29.92 22.76,29.92 22.24,30.44 R1.1 | v43.38,37.26 43.38,37.19 43.71,36.85 43.71,33.91 39.8,30 24.6,30 24.53,29.92 | 24.53,29.92 24.49,29.88 25.02,29.88 25.22,29.68 R3.1
SOLV1  (via drill 0.35)
  Top 0.152: R2.1 32.87,28.69 v32.25,29.31 31.62,28.69 R5.1 | v46.43,37.44 46.48,37.49 46.48,37.77 45.87,38.38 U1.22
  Bottom 0.152: v46.43,37.44 44.56,37.44 44.02,36.89 44.02,33.78 39.9,29.67 32.6,29.67 v32.25,29.31
SOLV2  (via drill 0.35)
  Top 0.152: U1.25 43.61,40.9 43.61,40.03 v43.05,39.47
  Bottom 0.152: v41.58,28.77 40.66,27.85 R7.1 | v41.58,28.77 42.04,28.31 R6.1 | v43.05,39.47 43.23,39.29 47.16,39.29 48.11,38.35 48.11,33.47 44.12,29.48 42.29,29.48 v41.58,28.77
SOLV3  (via drill 0.35)
  Top 0.152: R8.1 51.89,29.68 v50.27,31.31 49.43,30.47 R9.1 | v45.64,41.15 44.94,41.85 43.4,41.85 43.14,41.59 U1.26
  Bottom 0.152: v50.27,31.31 50.27,39.99 49.11,41.15 v45.64,41.15
SOLV4  (via drill 0.35)
  Top 0.152: U1.27 42.77,41.05 42.77,41.72 43.31,42.27 44.43,42.27 44.45,42.29 v46.35,42.29
  Bottom 0.152: v46.35,42.29 49.07,42.29 59.88,31.48 59.88,30 | R10.1 59.88,29.31 59.88,30 | R11.1 58.72,28.84 59.88,30
SOLV5  (via drill 0.35)
  Top 0.152: U1.28 42.16,40.95 42.16,41.77 43.22,42.82 v44.2,42.82 | R12.1 68.78,28.8 v67.13,30.45 v67.13,30.44 R24.1
  Bottom 0.152: v44.2,42.82 44.22,42.85 49,42.85 60.63,31.22 66.36,31.22 v67.13,30.45
SOLV6  (via drill 0.35)
  Top 0.152: v41.6,42.75 41.64,42.71 U1.29
  Bottom 0.152: v41.6,42.75 42.24,43.38 49.43,43.38 60.25,32.56 73.41,32.56 75.36,30.61 | 75.36,30.61 75.36,28.66 R25.1 | 75.36,30.61 75.41,30.56 76.81,30.56 77.72,29.64 R26.1
SOLV9  (via drill 0.35)
  Top 0.152: U3.25 43.61,90.89 43.61,90.03 v43.05,89.47
  Bottom 0.152: v41.58,78.77 40.66,77.85 R50.1 | v41.58,78.77 42.04,78.31 R49.1 | v43.05,89.47 43.23,89.29 47.16,89.29 48.11,88.35 48.11,83.47 44.12,79.48 42.29,79.48 v41.58,78.77
SOLV10  (via drill 0.35)
  Top 0.152: R38.1 32.87,78.69 v32.25,79.31 31.62,78.69 R48.1 | v46.43,87.44 46.48,87.49 46.48,87.77 45.87,88.38 U3.22
  Bottom 0.152: v46.43,87.44 44.56,87.44 44.02,86.89 44.02,83.78 39.9,79.67 32.6,79.67 v32.25,79.31
SOLV11  (via drill 0.35)
  Top 0.152: R51.1 51.89,79.68 v50.27,81.31 49.43,80.47 R52.1 | v45.64,91.15 44.94,91.86 43.4,91.86 43.14,91.59 U3.26
  Bottom 0.152: v50.27,81.31 50.27,89.99 49.11,91.15 v45.64,91.15
SOLV12  (via drill 0.35)
  Top 0.152: U3.28 42.16,90.95 42.16,91.77 43.22,92.82 v44.2,92.82 | R30.1 68.78,78.8 v67.13,80.45 v67.13,80.44 R43.1
  Bottom 0.152: v44.2,92.82 44.22,92.85 49,92.85 60.63,81.22 66.36,81.22 v67.13,80.45
SOLV13  (via drill 0.35)
  Top 0.152: v41.6,92.75 41.64,92.71 U3.29
  Bottom 0.152: v41.6,92.75 42.24,93.38 49.43,93.38 60.25,82.56 73.41,82.56 75.36,80.61 | 75.36,80.61 75.36,78.66 R44.1 | 75.36,80.61 75.41,80.56 76.81,80.56 77.72,79.64 R45.1
SOLV16  (via drill 0.35)
  Top 0.152: U3.21 44,87.88 v43.38,87.26
  Bottom 0.152: 24.53,79.92 22.76,79.92 22.24,80.44 R27.1 | v43.38,87.26 43.38,87.19 43.71,86.86 43.71,83.91 39.8,80 24.6,80 24.53,79.92 | 24.53,79.92 24.49,79.88 25.02,79.88 25.22,79.68 R46.1
SOLV17  (via drill 0.35)
  Top 0.152: U3.27 42.77,91.05 42.77,91.72 43.31,92.27 44.43,92.27 44.45,92.29 v46.35,92.29
  Bottom 0.152: v46.35,92.29 49.07,92.29 59.88,81.48 59.88,80 | R28.1 59.88,79.31 59.88,80 | R29.1 58.72,78.84 59.88,80
SWCLK  (via drill 0.35)
  Top 0.152: v35.38,39.73 35.46,39.73 35.76,39.42 36.55,39.42 U1.37
  Bottom 0.152: JP2.4 7.09,15.37 7.09,16.77 7.67,17.35 12.43,17.35 17.15,22.07 17.15,24.61 20.17,27.63 26.43,27.63 27.04,28.25 34.47,28.25 35.16,28.93 40.08,28.93 47.39,36.24 47.39,37.74 46.66,38.48 43.23,38.48 42.37,37.62 42.37,36.4 42.82,35.94 42.82,34.06 41.12,32.36 38.02,32.36 36.09,34.29 36.09,36.35 36.12,36.38 36.12,38.63 36.12,38.99 v35.38,39.73
SWCLK1  (via drill 0.35)
  Top 0.152: v35.38,89.73 35.46,89.73 35.76,89.42 36.55,89.42 U3.37
  Bottom 0.152: JP1.4 7.09,65.37 7.09,66.77 7.67,67.35 12.43,67.35 17.15,72.07 17.15,74.61 20.17,77.63 26.43,77.63 27.04,78.25 34.47,78.25 35.16,78.93 40.08,78.93 47.39,86.25 47.39,87.75 46.66,88.48 43.23,88.48 42.37,87.62 42.37,86.4 42.82,85.94 42.82,84.06 41.12,82.36 38.02,82.36 36.09,84.29 36.09,86.35 36.12,86.38 36.12,88.63 36.12,88.99 v35.38,89.73
SWDIO  (via drill 0.35)
  Top 0.152: JP2.2 6.88,12.62 6.88,14.43 7.62,15.16 8.97,15.16 15.15,21.35 51.41,21.35 53.28,23.22 53.28,31.18 57.33,35.23 v57.33,36.83 | v41.66,44.02 41.33,44.02 39.14,41.84 U1.34
  Bottom 0.152: v41.66,44.02 42.2,44.56 42.2,46.45 44.11,48.37 48.95,48.37 50.09,47.23 50.09,44.44 57.33,37.2 v57.33,36.83
SWDIO1  (via drill 0.35)
  Top 0.152: JP1.2 6.88,62.62 6.88,64.43 7.62,65.16 8.97,65.16 15.15,71.35 51.41,71.35 53.28,73.22 53.28,81.18 57.33,85.23 v57.33,86.83 | v41.66,94.02 41.33,94.02 39.14,91.84 U3.34
  Bottom 0.152: v41.66,94.02 42.2,94.56 42.2,96.45 44.11,98.36 48.95,98.36 50.09,97.23 50.09,94.44 57.33,87.2 v57.33,86.83
UART_RX  (via drill 0.35)
  Top 0.152: v35,34.21 32.62,34.21 32.4,34.44 31.66,34.44 29.96,32.74 27.79,32.74 17.96,22.91 5,22.91 4.04,21.95 4.04,20.59 5.54,19.1 JP2.8 | v34.9,36.35 34.93,36.38 U1.43
  Bottom 0.152: v35,34.21 35.1,34.31 35.1,35.84 34.9,36.04 v34.9,36.35
UART_RX1  (via drill 0.35)
  Top 0.152: v35,84.21 32.62,84.21 32.4,84.44 31.66,84.44 29.96,82.74 27.79,82.74 17.96,72.91 5,72.91 4.04,71.95 4.04,70.59 5.54,69.1 JP1.8 | v34.9,86.35 34.93,86.38 U3.43
  Bottom 0.152: v35,84.21 35.1,84.31 35.1,85.84 34.9,86.04 v34.9,86.35
UART_TX  (via drill 0.35)
  Top 0.152: v35,37.21 35.59,37.21 35.92,36.88 U1.42
  Bottom 0.152: JP2.6 7.09,17.91 7.09,19.31 7.67,19.89 9.07,19.89 13.81,24.63 13.81,25.9 14.39,26.48 15.66,26.48 20.72,31.54 20.72,38.83 21.46,39.57 33.58,39.57 35,38.15 v35,37.21
UART_TX1  (via drill 0.35)
  Top 0.152: v35,87.21 35.59,87.21 35.92,86.88 U3.42
  Bottom 0.152: JP1.6 7.09,67.91 7.09,69.31 7.67,69.89 9.07,69.89 13.81,74.63 13.81,75.9 14.39,76.48 15.66,76.48 20.72,81.54 20.72,88.83 21.46,89.57 33.58,89.57 35,88.15 v35,87.21
VCC  (via drill 0.35)
  Top 0.508: v16.15,17.25 29.85,17.25 | 29.85,17.25 29.73,17.37 47.91,17.37 | 29.85,17.25 RLY-1.8 | 47.91,17.37 RLY-3.8 | 47.91,17.37 66.07,17.37 RLY-5.8
  Bottom 0.508: 24V.2 14.15,12.41 | 14.15,12.41 RLY-0.8 | 14.15,12.41 14.15,15.47 15.3,16.62 | v16.15,17.25 15.93,17.25 15.3,16.62 | 15.3,16.62 31.95,16.62 | 31.95,16.62 RLY-2.8 | 31.95,16.62 50.11,16.62 | 50.11,16.62 RLY-4.8 | 50.11,16.62 68.29,16.62 RLY-6.8
VCC1  (via drill 0.35)
  Top 0.508: v16.15,67.25 29.85,67.25 | 29.85,67.25 29.73,67.37 47.91,67.37 | 29.85,67.25 RLY-8.8 | 47.91,67.37 RLY-10.8 | 47.91,67.37 66.07,67.37 RLY-12.8
  Bottom 0.508: 24V1.2 14.15,62.41 | 14.15,62.41 RLY-7.8 | 14.15,62.41 14.15,65.47 15.3,66.62 | v16.15,67.25 15.93,67.25 15.3,66.62 | 15.3,66.62 31.95,66.62 | 31.95,66.62 RLY-9.8 | 31.95,66.62 50.11,66.62 | 50.11,66.62 RLY-11.8 | 50.11,66.62 68.29,66.62 RLY-13.8

## Text on the board
_tNames: C14 | R21 | R22 | D11 | D10 | C17 | D9 | SW1 | F1 | U$6 | R17 | C15 | R23 | L1 | R20 | U7 | C16 | C19 | D8 | U2 | U1 | C20 | R9 | C18 | R16 | R19 | R8 | R24 | R5 | R2 | R12 | CN1 | RLY-1 | RLY-3 | RLY-5 | JP2 | X2 | X3 | X4 | X5 | X6 | 24V | X0 | X1 | C14 | R21 | R22 | D11 | D10 | C17 | D9 | SW1 | F1 | U$6 | R17 | C15 | R23 | L1 | R20 | U7 | C16 | C19 | D8 | U2 | U1 | C20 | R9 | C18 | R16 | R19 | R8 | R24 | R5 | R2 | R12 | CN1 | RLY-1 | RLY-3 | RLY-5 | JP2 | X2 | X3 | X4 | X5 | X6 | 24V | X0 | X1
_bNames: R15 | R14 | R13 | U6 | R18 | R4 | R11 | R10 | R7 | R25 | R1 | R3 | R26 | R6 | RLY-0 | RLY-2 | RLY-4 | RLY-6 | D1 | D2 | D3 | D4 | D5 | D6 | D7 | R15 | R14 | R13 | U6 | R18 | R4 | R11 | R10 | R7 | R25 | R1 | R3 | R26 | R6 | RLY-0 | RLY-2 | RLY-4 | RLY-6 | D1 | D2 | D3 | D4 | D5 | D6 | D7